# Altium PCB JHZ-E01S-HW-Drive-HI-S0.1-面罩电机驱动器.PcbDoc
Units mil, origin at the board's own origin, x right, y up, seen from the top; angles counter-clockwise.
Board outline 1574.8 x 1968.5 mil, 2 copper layers (Top Layer, Bottom Layer); 85 components, 46 nets, 248 pads, 77 vias.
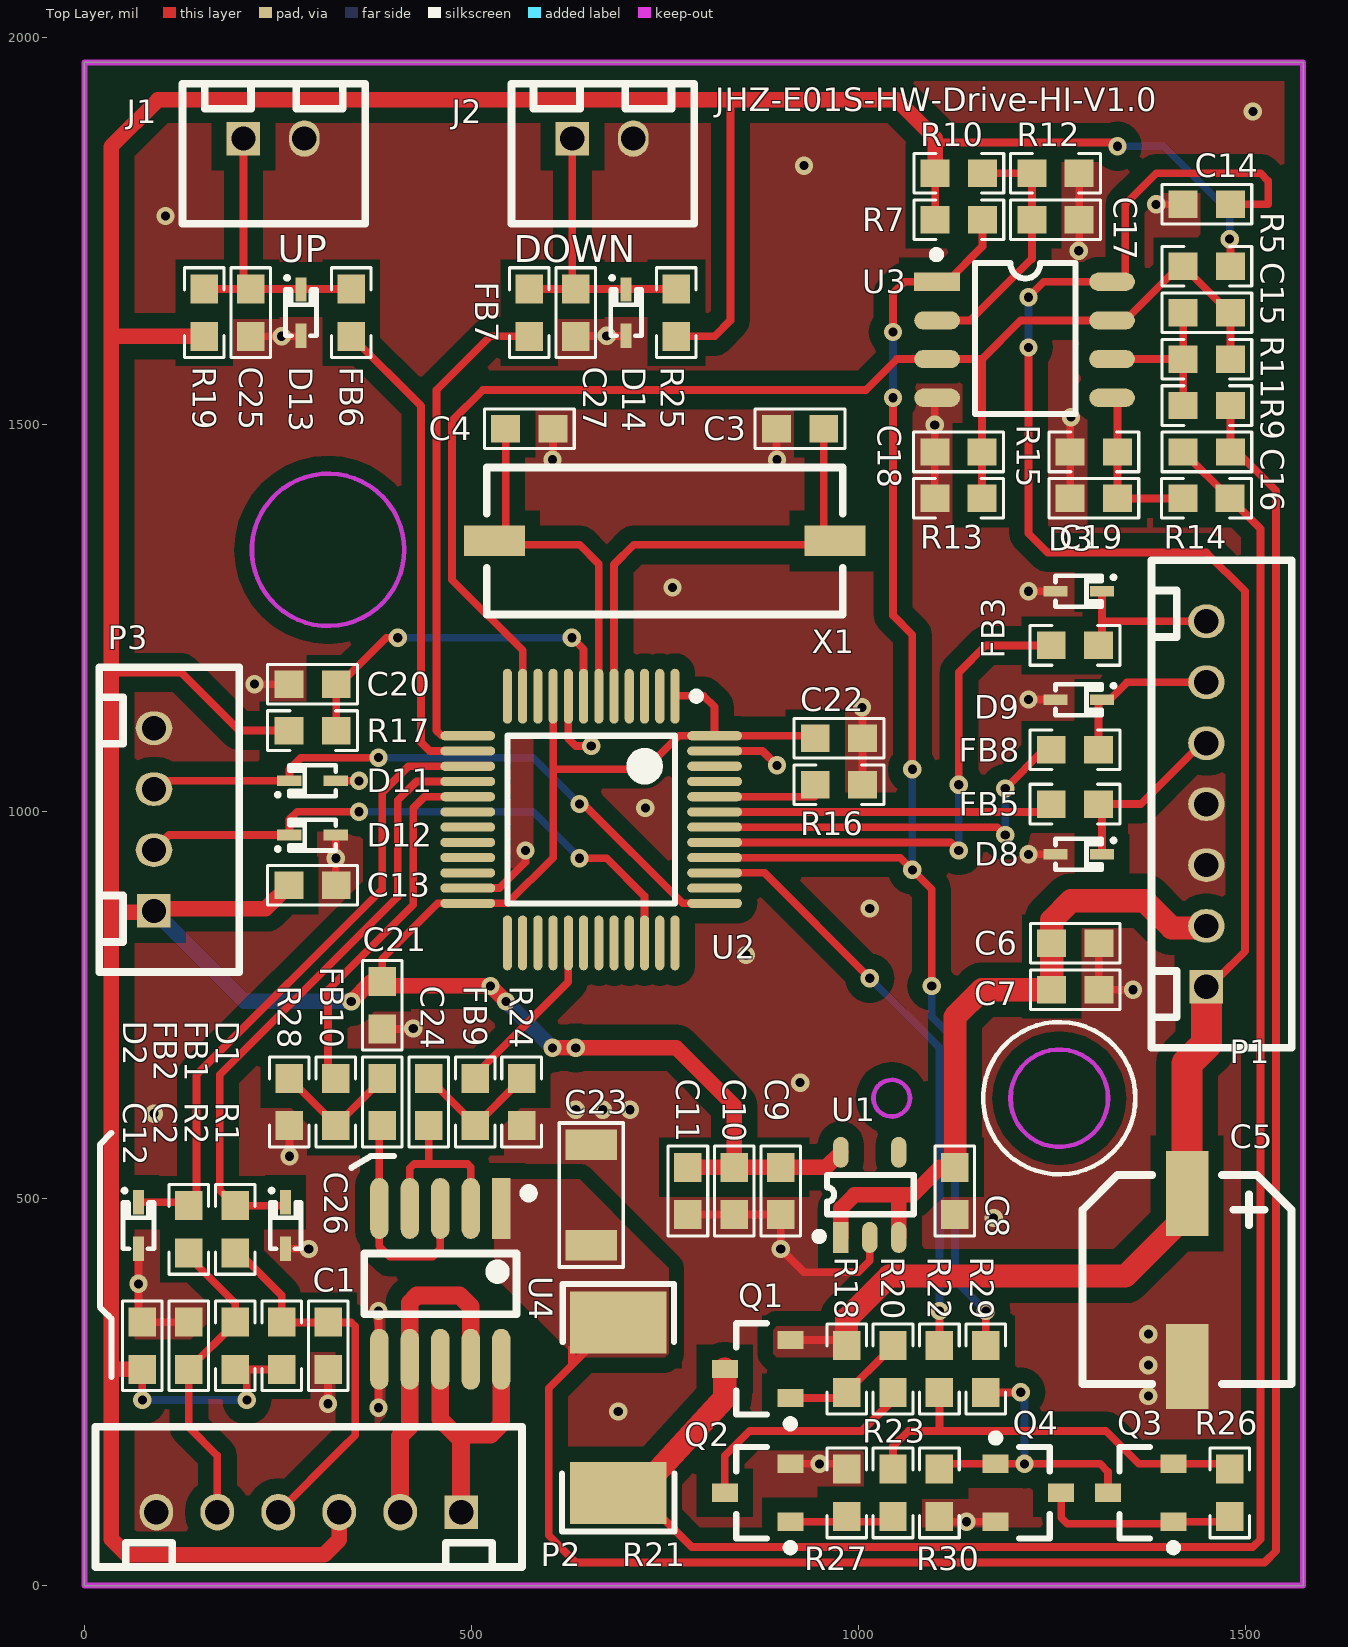
[diagram p0: Top Layer view]
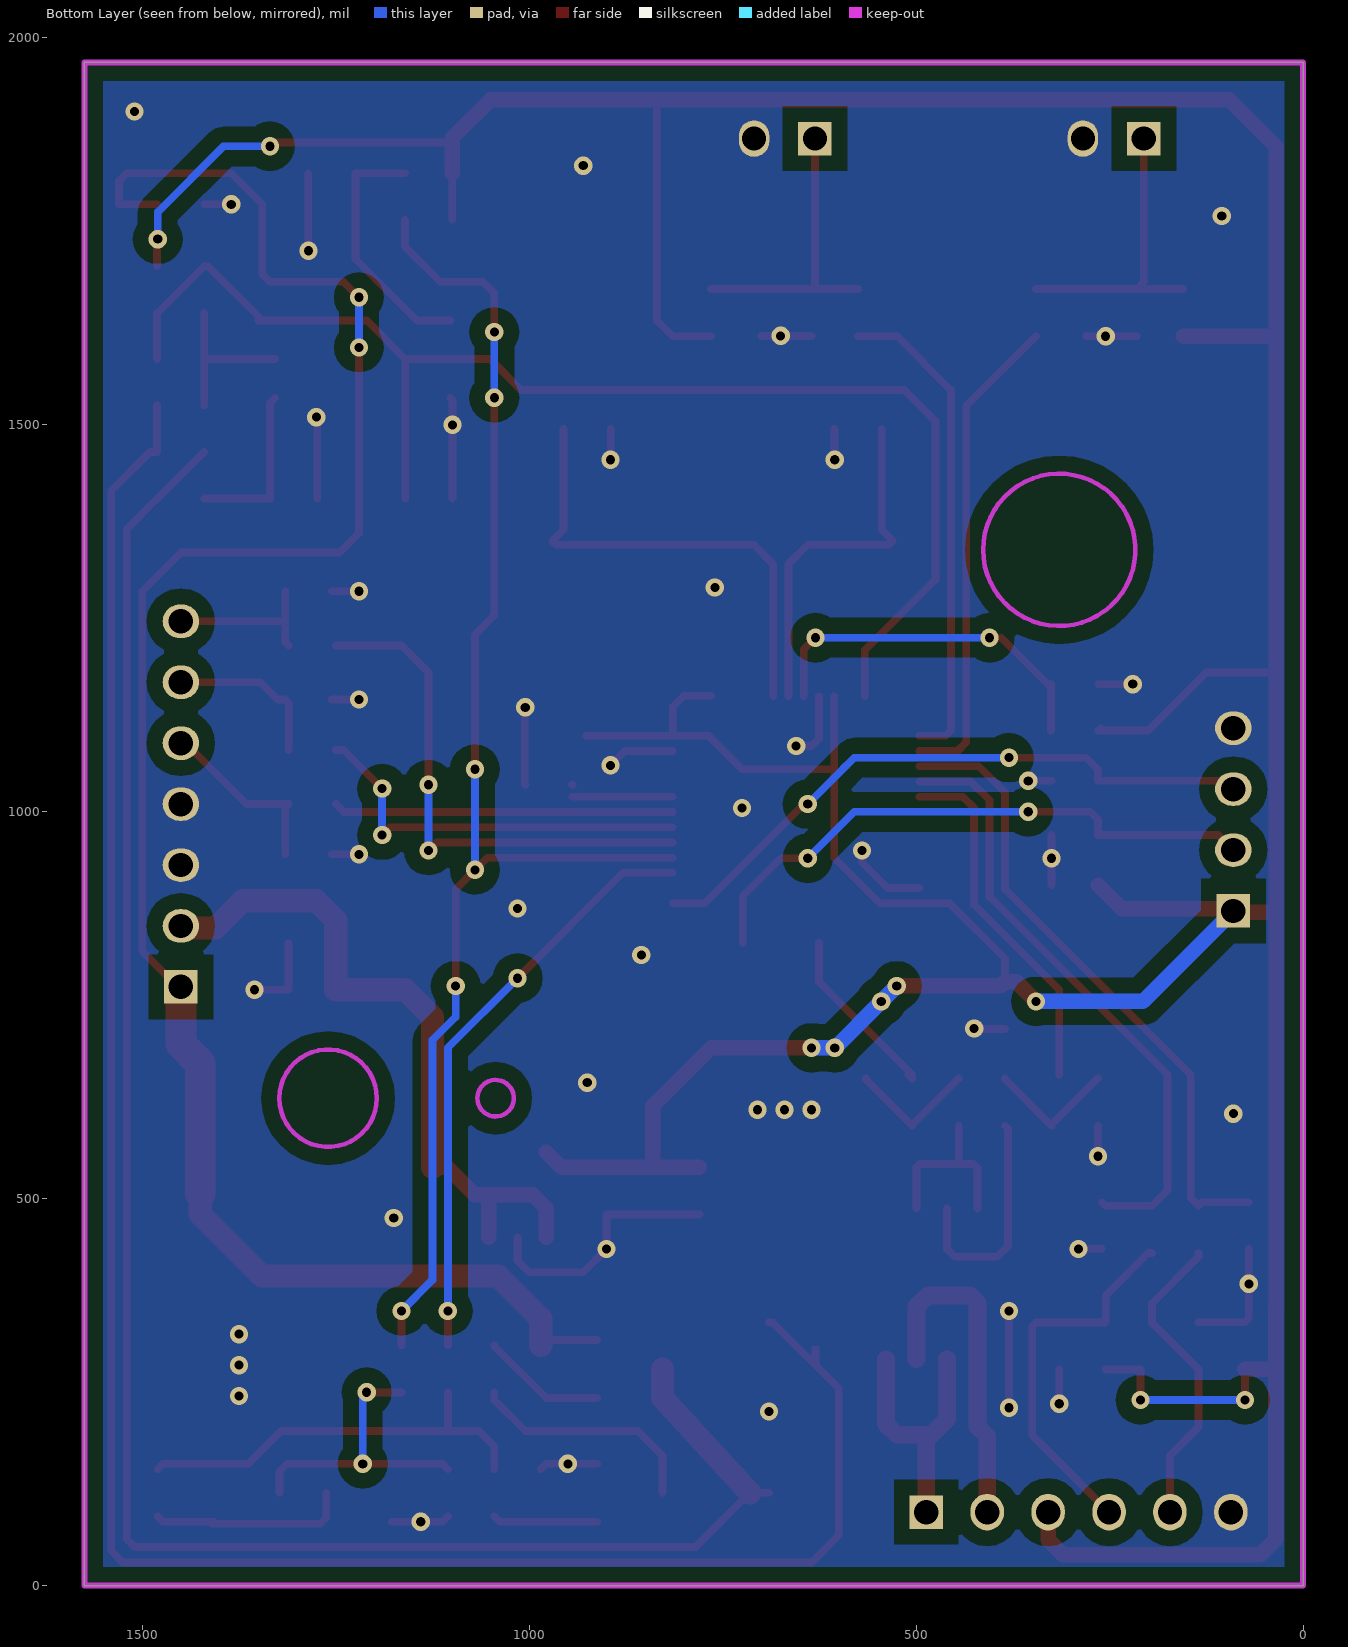
[diagram p1: Bottom Layer view, seen from below]

## Layer stack, top to bottom
Top Layer: signal copper 1.4
Dielectric: dielectric 12.6, FR-4, Dk 4.8
Bottom Layer: signal copper 1.4

## Board outline
0,0 0,1968.5 1574.8,1968.5 1574.8,0

## Design rules (kind name [scope] priority, off if disabled: settings)
Clearance [All] p1: gap=7
ComponentClearance [All] p1: gap=0 collisioncheckmode=3 verticalgap=0 showdistances=FALSE
HoleToHoleClearance [All] p1: gap=0 allowstackedmicrovias=TRUE
MinimumSolderMaskSliver [All] p1: minsoldermaskwidth=0
PlaneConnect [All] p1: planeconnectstyle=Direct reliefexpansion=20 reliefentries=4 reliefconductorwidth=10 reliefairgap=10
PolygonConnect [All] p1: connectstyle=Direct reliefconductorwidth=10 reliefentries=4 polygonreliefangle="90 Angle"
RoutingVias [All] p1: holewidth=11.81 width=23.62 viastyle="Through Hole" minholewidth=11.81 minwidth=23.62 maxholewidth=118.11 maxwidth=236.22
SilkToSilkClearance [All] p1: silktosilkclearance=0
SilkscreenOverComponentPads SilkToSolderMaskClearance [IsPad] p1: minsilkscreentomaskgap=0
SolderMaskExpansion [All] p1: expansion=4
TestPointUsage FabricationTestPointUsage [All] p1: valid=0 allowmultiple=FALSE
Testpoint FabricationTestpoint [All] p1: side=3 testpointundercomponent=TRUE minsize=40 maxsize=100 preferedsize=60 minholesize=0 maxholesize=40 preferedholesize=32 testpointgrid=1 style=297 order=0123456789
Width [All] p1: maxlimit=500 minlimit=7 preferedwidth=10
18 further rules are at their usual default settings.

## Components (designator, comment, footprint, x,y, rotation, side; value= is the part's Value field where it differs from the comment)
C1 "C0603" C0603_M1608 315,310 r270 top
C2 "C0603" C0603_M1608 135,310 r90 top
C3 "C0603" C0603_M1608 925,1495 r0 top
C4 "C0603" C0603_M1608 575,1495 r180 top
C5 "CAP_SMD_6.3*7.7" CAP_SMD_6.3*7.7 1425,395 r0 top
C6 "C0603" C0603_M1608 1280.51,830 r180 top
C7 "C0603" C0603_M1608 1280.51,770 r180 top
C8 "C0603" C0603_M1608 1125,510 r90 top
C9 "C0603" C0603_M1608 900,510 r270 top
C10 "C0603" C0603_M1608 840,510 r270 top
C11 "C0603" C0603_M1608 780,510 r270 top
C12 "C0603" C0603_M1608 75,310 r90 top
C13 "C0603" C0603_M1608 295,905 r0 top
C14 "C0603" C0603_M1608 1450.51,1785 r180 top
C15 "C0603" C0603_M1608 1450.51,1645 r0 top
C16 "C0603" C0603_M1608 1450.51,1465 r0 top
C17 "C0603" C0603_M1608 1255,1765 r180 top
C18 "Cap" C0603_M1608 1129.49,1465 r0 top
C19 "C0603" C0603_M1608 1304.49,1405 r0 top
C20 "C0603" C0603_M1608 295,1165 r0 top
C21 "C0603" C0603_M1608 385,750 r270 top
C22 "C0603" C0603_M1608 975,1095 r0 top
C23 "C1206" C1206_M3216 655,505 r90 top
C24 "C0603" C0603_M1608 445,625 r270 top
C25 "C0603" C0603_M1608 215,1645 r90 top
C26 "C0603" C0603_M1608 385,625 r270 top
C27 "C0603" C0603_M1608 635,1645 r90 top
D1 "SOD-523" SOD-523 260,465.51 r90 top
D2 "SOD-523" SOD-523 70,465.51 r90 top
D3 "SOD-523" SOD-523 1285,1285 r0 top
D8 "SOD-523" SOD-523 1285,945 r0 top
D9 "SOD-523" SOD-523 1285,1145 r0 top
D11 "SOD-523" SOD-523 295,1040 r180 top
D12 "SOD-523" SOD-523 295,970 r180 top
D13 "SOD-523" SOD-523 280,1645 r90 top
D14 "SOD-523" SOD-523 700,1645 r90 top
FB1 "FBM1608-0E0PT" R0603_M1608 195,460.51 r270 top
FB2 "FBM1608-0E0PT" R0603_M1608 135,460.51 r270 top
FB3 "FBM1608-0E0PT" R0603_M1608 1280,1215 r180 top
FB5 "FBM1608-0E0PT" R0603_M1608 1280,1010 r180 top
FB6 "FBM1608-0E0PT" R0603_M1608 345,1645 r90 top
FB7 "FBM1608-0E0PT" R0603_M1608 575,1645 r90 top
FB8 "FBM1608-0E0PT" R0603_M1608 1280,1080 r180 top
FB9 "FBM1608-0E0PT" R0603_M1608 505,625 r90 top
FB10 "FBM1608-0E0PT" R0603_M1608 325,625 r90 top
J1 "PH-A-2P" PH-A-2P 245,1870 r0 top
J2 "PH-A-2P" PH-A-2P 670,1870 r0 top
P1 "PH-A-7P" PH-A-7P 1450,1010 r90 top
P2 "PH-A-6P" PH-A-6P 290,95 r180 top
P3 "PH2.0-4P" PH-A-4P 90,990 r90 top
Q1 "SOT-23-3" SOT-23-3 870,280 r180 top
Q2 "SOT-23" SOT-23_L 870,120 r180 top
Q3 "SOT-23-3" SOT-23-3 1365,120 r180 top
Q4 "SOT-23" SOT-23_L 1220,120 r0 top
R1 "R0603" R0603_M1608 255,310 r270 top
R2 "R0603" R0603_M1608 195,310 r270 top
R5 "R0603" R0603_M1608 1450.51,1705 r180 top
R7 "R0603" R0603_M1608 1130,1765 r180 top
R9 "R0603" R0603_M1608 1450.51,1525 r180 top
R10 "R0603" R0603_M1608 1130,1825 r180 top
R11 "R0603" R0603_M1608 1450.51,1585 r180 top
R12 "R0603" R0603_M1608 1255,1825 r180 top
R13 "R0603" R0603_M1608 1129.49,1405 r0 top
R14 "R0603" R0603_M1608 1450,1405 r180 top
R15 "R0603" R0603_M1608 1304.49,1465 r0 top
R16 "R0603" R0603_M1608 975,1035 r180 top
R17 "R0603" R0603_M1608 295,1105 r180 top
R18 "R0603" R0603_M1608 985,280 r90 top
R19 "R0603" R0603_M1608 155,1645 r270 top
R20 "R0603" R0603_M1608 1045,280 r90 top
R21 "R2512" R2512_M6332 690,230 r90 top
R22 "R0603" R0603_M1608 1105,280 r90 top
R23 "R0603" R0603_M1608 1045,120 r90 top
R24 "R0603" R0603_M1608 565,625 r270 top
R25 "R0603" R0603_M1608 765,1645 r270 top
R26 "R0603" R0603_M1608 1480,120 r90 top
R27 "R0603" R0603_M1608 985,120 r270 top
R28 "R0603" R0603_M1608 265,625 r270 top
R29 "R0603" R0603_M1608 1165,280 r90 top
R30 "R0603" R0603_M1608 1105,120 r90 top
U1 "SOT23-5" SOT-23-5 1015,505 r90 top
U2 "LQFP48_N" LQFP48_N 655,990 r270 top
U3 "SOIC-8" SOIC-8 1215,1610 r0 top
U4 "L-SOIC-10" L-SOIC-10 460,390 r270 top
X1 "8M" HC-49SMD 750,1350 r0 top

## Footprints (in the part's own frame and the unit in brackets; to place one, negate y for a bottom-side part, rotate by r counter-clockwise, add the part's x,y. Pads: shape width x height; smd on the part's side, far side on the other; paste and mask are expansions set on the pad)
C0603_M1608 [mm] "Chip Capacitor, 2-Leads, Body 1.6x0.8mm, IPC Medium Density"
  rect 0.95x0.9 smd: 1(-0.775,0) 2(0.775,0)
  silkscreen extent -1.48,-0.65 1.48,0.65
C1206_M3216 [mm]
  rect 1x1.7 smd: 1(-1.65,0) 2(1.65,0)
  silkscreen extent -2.36,-1.05 2.36,1.05
CAP_SMD_6.3*7.7 [mm]
  rrect0% 1.4x2.8 smd: 1(0,2.838) 2(0,-2.838)
  silkscreen extent -3.43,-3.41 3.43,3.45
HC-49SMD [mm]
  rect 2x1 smd: 1(-5.588,0) 2(5.588,0)
  silkscreen extent -5.84,-2.41 5.84,2.41
L-SOIC-10 [mm]
  rect 2x0.6 smd: 1(-2.475,2)
  oval 2x0.6 smd: 2(-2.475,1) 3(-2.475,0) 4(-2.475,-1) 5(-2.475,-2) 6(2.475,-2) 7(2.475,-1) 8(2.475,0) 9(2.475,1) 10(2.475,2)
  silkscreen extent -3.12,-2.5 1,3.05
LQFP48_N [mm]
  oval 1.8x0.3 smd: 1(-4.05,2.75) 2(-4.05,2.25) 3(-4.05,1.75) 4(-4.05,1.25) 5(-4.05,0.75) 6(-4.05,0.25) 7(-4.05,-0.25) 8(-4.05,-0.75) 9(-4.05,-1.25) 10(-4.05,-1.75) 11(-4.05,-2.25) 12(-4.05,-2.75) 25(4.05,-2.75) 26(4.05,-2.25) 27(4.05,-1.75) 28(4.05,-1.25) 29(4.05,-0.75) 30(4.05,-0.25) 31(4.05,0.25) 32(4.05,0.75) 33(4.05,1.25) 34(4.05,1.75) 35(4.05,2.25) 36(4.05,2.75)
  oval 0.3x1.8 smd: 13(-2.75,-4.05) 14(-2.25,-4.05) 15(-1.75,-4.05) 16(-1.25,-4.05) 17(-0.75,-4.05) 18(-0.25,-4.05) 19(0.25,-4.05) 20(0.75,-4.05) 21(1.25,-4.05) 22(1.75,-4.05) 23(2.25,-4.05) 24(2.75,-4.05) 37(2.75,4.05) 38(2.25,4.05) 39(1.75,4.05) 40(1.25,4.05) 41(0.75,4.05) 42(0.25,4.05) 43(-0.25,4.05) 44(-0.75,4.05) 45(-1.25,4.05) 46(-1.75,4.05) 47(-2.25,4.05) 48(-2.75,4.05)
  silkscreen extent -4.17,-2.75 2.75,3.58
PH-A-2P [mm]
  rect 1.1x1.1 hole 0.8: 1(-1,0)
  oval 1x1.2 hole 0.8: 2(1,0)
  silkscreen extent -3,-2.8 3,1.8
PH-A-4P [mm]
  rect 1.1x1.1 hole 0.8: 1(-3,0)
  oval 1.1x1.2 hole 0.8: 2(-1,0) 3(1,0) 4(3,0)
  silkscreen extent -5,-2.8 5,1.8
PH-A-6P [mm]
  rect 1.1x1.1 hole 0.8: 1(-5,0)
  oval 1.1x1.2 hole 0.8: 2(-3,0) 3(-1,0) 4(1,0) 5(3,0) 6(5,0)
  silkscreen extent -7,-2.8 7,1.8
PH-A-7P [mm]
  rect 1.1x1.1 hole 0.8: 1(-6,0)
  oval 1.1x1.2 hole 0.8: 2(-4,0) 3(-2,0) 4(0,0) 5(2,0) 6(4,0) 7(6,0)
  silkscreen extent -8,-2.8 8,1.8
R0603_M1608 [mm]
  rect 0.95x0.9 smd: 1(-0.775,0) 2(0.775,0)
  silkscreen extent -1.48,-0.65 1.48,0.65
R2512_M6332 [mil]
  rect 80x125 smd: 1(-110,0) 2(110,0)
  silkscreen extent -160,-73 160,73
SOD-523 [mm]
  rect 0.8x0.35 smd: 1(-0.762,0) 2(0.762,0)
  silkscreen extent -0.76,-0.51 1.19,0.51
SOIC-8 [mm]
  rect 1.5x0.6 smd: 1(-2.872,1.905)
  oval 1.5x0.6 smd: 2(-2.872,0.635) 3(-2.872,-0.635) 4(-2.872,-1.905) 5(2.872,-1.905) 6(2.872,-0.635) 7(2.872,0.635) 8(2.872,1.905)
  silkscreen extent -3.02,-2.44 1.68,2.92
SOT-23-3 [mm] "SOT23, 3-Leads, Body 2.9x1.3mm, Pitch 0.95mm, Lead Span 2.5mm, IPC High Density"
  rect 0.85x0.6 smd: 1(-1.075,0.95) 2(-1.075,-0.95) 3(1.075,0)
  silkscreen extent -1.2,-1.5 0.7,1.92, body extent -0.7,-1.5 0.7,1.5, height 1.1
SOT-23-5 [mil] "SOT23, 5-Leads, Body 3.1x3.0mm (max), Pitch 0.95mm, IPC Medium Density"
  rect 40x20 smd: 1(-55,37.4)
  oval 40x20 smd: 2(-55,0) 3(-55,-37.4) 4(55,-37.4) 5(55,37.4)
  silkscreen extent -59,-57 26,70
SOT-23_L [mm] "SOT23, 3-Leads, Body 2.9x1.3mm, Pitch 0.95mm, Lead Span 2.5mm, IPC High Density"
  rect 0.85x0.6 smd: 1(-1.075,0.95) 2(-1.075,-0.95) 3(1.075,0)
  silkscreen extent -1.2,-1.5 0.7,1.92, body extent -0.7,-1.5 0.7,1.5, height 1.1

## Part data
C1 C2 C12 C14 C15 C16 C17 C19: library part MCC0603, "Multilayer Ceramic Capacitor 0603"
C3 C4 C6 C7 C8 C9 C10 C11 C13 C20 C21 C22 C23 C24 C25 C26 C27: library part Cap, "Capacitor"
C5: "SMD Capacitor 6.3*7.7"
C18: "Capacitor"
D1 D2 D3 D8 D9 D11 D12 D13 D14: library part SK2B, "2.0A SURFACE MOUNT SCHOTTKY BARRIER  RECTIFIERS"
FB1 FB2 FB3 FB5 FB6 FB7 FB8 FB9 FB10: "磁珠Ferrite Bead"
J1 J2: "Header, 2.0mm,2-Pin"
P1: "Header, 2.0mm,7-Pin"
P2: "Header, 2.0mm,6-Pin"
P3: library part "Header 4", "Header, 4-Pin"
Q1: library part AO3415, "P-Channel MOSFET"
Q2 Q4: library part NPN, "NPN Bipolar Transistor"
Q3: library part SS8550LT1, "PNP Bipolar Transistor"
R1 R2 R7 R16 R17 R18 R19 R20 R21 R22 R23 R24 R25 R26 R27 R28 R29 R30: library part Res1, "Resistor"
R5 R9 R10 R11 R12 R13 R14 R15: library part R0603_M1608, "Resistor"
U1: library part XC6503D301MR
U2: library part STM32F103C8T6, "STM32 ARM-based 32-bit MCU with 64 Kbytes Flash, 48-pin LQFP, Industrial Temperature"
U3: library part LM358ADR, "Dual Operational Amplifiers"
U4: library part LV8548MC
X1: library part XTAL

## Via types
v1: diameter 23.62, hole 11.81, Top Layer to Bottom Layer, tented both sides, 73 vias
v2: diameter 23.62, hole 11.81, Top Layer to Bottom Layer, 4 vias

## Nets (pads, with @x,y where several pads share a name; then routed paths per layer and width w, separated by ;. In a path a pad name is that pad's centre, name@x,y a point inside that pad or via, vN(x,y) a via of type N, cw(c..) or ccw(c..) an arc to the next point about the centre after c; other vN are vias at no path point)
3V3: C9.1 C10.1 C11.1 C12.1 C13.1 C21.1 C22.1 P2.3 P3.1 R1.2 R2.2 R5.1 R7.2 R10.2 R17.2 R19.2 R25.2 U1.5 U2.1 U2.9 U2.24 U2.48 | length 7314.7
  Top Layer w10: 34.64,1180 125,1180 200,1105 R17.2 R17.2@261.38,1108.11 ; v1(75,240) C12.1 ; v1(210,240) 210,279.49 R1.2 ; C21.1 385,810 456.73,881.73 U2.24 546.73,881.73 605.79,940.79 605.79,1055 ; U2.9 605.79,1055 ; 740,1070 745,1075 ; U2.1@765,1150 800,1150 814.45,1135.55 U2.48 ; R25.2 814.49,1614.49 835,1635 835,1920 ; C10.1@840,539.49 C10.1 ; C22.1@926.22,1098.27 U2.48 ; R7.2 R10.2 ; 1099.49,1870.51 1105,1865 1330,1865 v1(1335,1860) ; R5.1 v1@1481.02,1738.98 ; 605.79,1055 725,1055 745,1075 ; 745,1075 768.27,1098.27 U2.48
  Top Layer w20: C12.1 35,279.49 ; R19.2 34.64,1614.49 ; C13.1 234.49,875 93.11,875 P3.1 88.11,870 34.64,870 ; P2.3 329.37,59.37 310,40 55,40 35,60 35,279.49 ; v1(345,755) 370.51,780.51 C21.1 390.51,775 v1(525,775) v1(545,755) ; v1(605,695) v1(635,695) 765,695 840,620 C10.1 ; C11.1 C10.1 ; U1.5 958.11,540.51 C9.1 C10.1 ; R10.2 1099.49,1870.51 1050,1920 835,1920 95,1920 34.64,1859.64 34.64,1614.49 ; 34.64,870 34.64,360 35,359.64 35,279.49 ; 34.64,870 34.64,1180 34.64,1614.49
  Bottom Layer w10: v1(75,240) v1(210,240) ; v1(1335,1860) 1395,1860 1480,1775 v1(1480,1740)
  Bottom Layer w20: P3.1 206.89,755 v1(345,755) ; v1(525,775) v1(545,755) v1(605,695) v1(635,695)
ADC-I: C15.2 C18.2 R5.2 R11.1 R13.2 U2.11 U3.3 U3.7 | length 1769.1
  Top Layer w10: U2.11 566.42,1208.58 475,1300 475,1505 515,1545 1010,1545 1050,1585 U3.3 1160,1585 ; R13.2 C18.2 1160,1585 ; U3.7@1350,1635 U3.7 ; R11.1 C15.2 1480,1645 R5.2 1415,1705 1345,1635 U3.7 ; 1160,1585 1210,1635 U3.7
ADC-I-M: C16.1 Q1.3 R14.1 R21.1 | length 2533.8
  Top Layer w10: R21.1 715,120 785,50 1510,50 1520,60 1520,620 ; C16.1 1480,1405 R14.1 1520,1365.51 1520,620 ; 1520,640 1520,620
  Top Layer w30: R21.1@715,120 827.68,242.68 Q1.3
ADC-I-M0: C16.2 C23.1 R9.1 R21.2 U4.1 | length 2800.6
  Top Layer w10: R21.2 685,340 600,255 600,65 635,30 1525,30 1540,45 1540,630 ; R9.1 C16.2 1490,1465 1540,1415 1540,630 ; 1540,645 1540,630
EN_PWR: R22.2 U2.39 | length 768.7
  Top Layer w10: U2.39 878.9,921.1 v1(1015,785) ; R22.2 v1(1105,355)
  Bottom Layer w10: v1(1015,785) 1105,695 v1(1105,355)
ENC-A: C1.1 FB1.2 P2.4 R1.1 | length 512.9
  Top Layer w10: FB1.2 200,430 255,375 R1.1 255.51,340 345,340 350,335 350,194.37 332.81,177.18 ; P2.4 332.81,177.18 ; 345,189.37 332.81,177.18
ENC-B: C2.1 FB2.2 P2.5 R2.1 | length 409.5
  Top Layer w10: FB2.2 135,425 195,365 R2.1 ; P2.5 171.89,168.11 135,205 135,225 C2.1 195,339.49 R2.1 ; R2.1@195,350 R2.1
ERR-OI: R7.1 R29.2 U2.40 U3.1 | length 1846.3
  Top Layer w10: U2.40 1054.21,940.79 v1(1070,925) 1095,900 v1(1095,775) ; v1(1045,1535) 1045,1253.8 1070,1228.8 v1(1070,1055) ; v1(1045,1620) 1045,1670 1060,1685 U3.1 1115,1685 1160.51,1730.51 R7.1 ; R29.2 v1(1165,355)
  Bottom Layer w10: v1(1045,1535) v1(1045,1620) ; v1(1070,925) v1(1070,1055) ; v1(1095,775) 1095,735 1125,705 1125,395 v1(1165,355)
GND: C1.2 C2.2 C3.1 C4.1 C5.2 C6.1 C7.1 C8.1 C9.2 C10.2 C11.2 C12.2 C13.2 C14.2 C17.1 C18.1 C19.1 C20.1 C21.2 C22.2 C23.2 C25.1 C27.1 D1.1 D2.1 D3.1 D8.1 D9.1 D11.1 D12.1 D13.1 D14.1 J1.2 J2.2 P1.3 P1.4 P2.6 P3.4 Q2.2 Q4.2 R12.1 R13.1 R15.1 R16.1 R24.2 R27.1 R28.2 R30.1 U1.2 U2.8 U2.23 U2.47 U3.4 U4.6 | length 2227.6
  Top Layer w10: D2.1 70,345.51 C12.2 C2.2 ; C25.1 279.49,1614.49 D13.1 ; v1(220,1165) C20.1 ; D1.1 289.49,435.51 v1(290,435) ; v1(265,555) R28.2 ; v1(315,235) C1.2 ; C13.2@325,905.51 D12.1 ; D11.1 v1(355,1040) ; v1(380,230) v1(380,355) ; C21.2 424.49,719.49 v1(425,720) ; U2.23 536.42,901.42 570,935 v1(570,950) ; v1(605,1455) 605.51,1455.51 C4.1 ; U2.8 625.47,1094.53 635,1085 v1(655,1085) ; C27.1 635.51,1615 D14.1 ; C11.2 C10.2 C9.2 v1(900,435) 930,405 1000,405 1015,420 U1.2 ; U2.47 876.42,1078.58 v1(895,1060) ; C3.1 894.49,1455.51 v1(895,1455) ; Q2.2 978.11,157.4 R27.1 ; R16.1@1004.49,1035 R16.1 C22.2 1005.51,1134.49 v1(1005,1135) ; R13.1 C18.1 1098.98,1532.03 U3.4 ; R30.1 1111.89,82.6 Q4.2 ; v1(1220,945) D8.1 ; v1(1220,1145) D9.1 ; v1(1220,1285) D3.1 ; C19.1 R15.1 1273.98,1508.98 v1(1275,1510) ; v1(1285,1725) 1285.51,1725.51 C17.1 R12.1 ; C6.1 C7.1 v1(1355,770) ; v1(1385,1785) C14.2
  other v1: 1140,82.6 950,157.4 690,225 1375,245 1375,285 1375,325 70,390 1175,475 90,610 635,615 670,615 705,615 925,650 855,815 1015,875 325,940 725,1005 760,1290 1098.98,1500 255,1614.49 675,1615 105,1770 930,1835 1510,1905
GPIO-MASK: FB3.2 U2.41 | length 683.9
  Top Layer w10: U2.41 1119.53,960.47 v2(1130,950) ; v2(1130,1035) 1130,1180 1165,1215 FB3.2
  Bottom Layer w10: v2(1130,950) v2(1130,1035)
GPIO-MASK-INT: D3.2 FB3.1 P1.7 | length 207.4
  Top Layer w10: FB3.1 1315,1219.49 1315,1245 ; D3.2 1315,1245 ; P1.7 1316.22,1246.22 1315,1245
IIC_SCL0: FB8.2 U2.42 | length 520
  Top Layer w10: U2.42 1179.84,980.16 v2(1190,970) ; v2(1190,1030) 1240,1080 FB8.2
  Bottom Layer w10: v2(1190,970) v2(1190,1030)
IIC_SCL-J: D9.2 FB8.1 P1.6 | length 211.2
  Top Layer w10: FB8.1 1310.51,1100 1310.51,1140.51 D9.2 1325,1145 1347.48,1167.48 P1.6
IIC_SDA0: FB5.2 U2.43 | length 439.2
  Top Layer w10: U2.43 1239.33,999.84 FB5.2
IIC_SDA-J: D8.2 FB5.1 P1.5 | length 268.5
  Top Layer w10: D8.2 1315,1005.51 FB5.1 ; 1340,1010 FB5.1 ; P1.5 1443.74,1088.74 1365,1010 FB5.1
IO-ENC-A: D1.2 FB1.1 U2.16 | length 809.1
  Top Layer w10: FB1.1@185,501.02 FB1.1 ; D1.2 255.51,491.02 FB1.1 ; U2.16 429.21,1039.21 405,1015 405,890 175,660 175,511.02 FB1.1
IO-ENC-B: D2.2 FB2.1 U2.15 | length 832.6
  Top Layer w10: D2.2 FB2.1@130.51,495.51 ; FB2.1 145,501.02 145,660 385,900 385,990 ; 385,980 385,990 ; U2.15 418.9,1058.9 385,1025 385,990
IO_KEY1: FB6.1 U2.14 | length 652
  Top Layer w10: FB6.1 435,1524.49 435,1275 ; 435,1250 435,1275 ; U2.14 446.42,1078.58 435,1090 435,1275
IO_KEY1-J: C25.2 D13.2 FB6.2 J1.1 R19.1 | length 388.4
  Top Layer w10: R19.1 C25.2 ; J1.1 205.63,1684.88 C25.2 ; FB6.2 C25.2
IO_KEY2: FB7.1 U2.13 | length 657.1
  Top Layer w10: 455,1255 455,1280 ; U2.13 461.73,1098.27 455,1105 455,1280 ; FB7.1 524.49,1614.49 455,1545 455,1280
IO_KEY2-J: C27.2 D14.2 FB7.2 J2.1 R25.1 | length 386.3
  Top Layer w10: FB7.2 C27.2 ; J2.1 630.63,1679.88 C27.2 ; R25.1 C27.2
MOTOR+: P2.1 U4.8 U4.10 | length 356.9
  Top Layer w23: U4.8 460,215 480,195 ; P2.1 486.85,188.15 480,195 ; U4.10 538.74,208.74 525,195 480,195
MOTOR-: P2.2 U4.7 U4.9 | length 432.5
  Top Layer w23: P2.2 408.11,193.11 420.63,205.63 U4.7 420.63,365.63 430,375 485,375 499.37,360.63 U4.9
NetC3_2: C3.2 U2.5 X1.2 | length 629.2
  Top Layer w10: U2.5 684.53,1319.53 710,1345 750,1345 ; 740,1345 965,1345 X1.2 955.51,1364.49 C3.2
NetC4_2: C4.2 U2.6 X1.1 | length 468.9
  Top Layer w10: C4.2 544.49,1364.49 X1.1 535,1345 640,1345 664.84,1320.16 U2.6
NetC15_1: C15.1 R9.2 R11.2 U3.6 | length 211.9
  Top Layer w10: U3.6 R11.2 ; R9.2 R11.2 ; C15.1 R11.2
NetC19_2: C19.2 R14.2 R15.2 U3.5 | length 217.4
  Top Layer w10: U3.5 1335,1528.06 C19.2 R14.2
NetC20_2: C20.2 R17.1 U2.7 | length 471.2
  Top Layer w10: R17.1 C20.2 330,1165 390,1225 v1(405,1225) ; v1(630,1225) 645.16,1209.84 U2.7
  Bottom Layer w10: v1(405,1225) v1(630,1225)
NetC24_2: C24.2 U4.2 U4.4 | length 237.5
  Top Layer w10: U4.4 420.63,539.37 426.26,545 445,545 ; C24.2 445,545 ; U4.2 499.37,540.63 495,545 445,545
NetC26_2: C26.2 U4.3 U4.5 | length 298.3
  Top Layer w10: C26.2 381.26,590.75 U4.5 381.26,438.74 395,425 450,425 460,435 U4.3
NetQ1_1: Q1.1 R18.1 R20.2 | length 161.4
  Top Layer w10: Q1.1 978.11,242.6 1045,309.49 R20.2
NetQ2_1: Q2.1 R23.1 R27.2 | length 135.5
  Top Layer w10: Q2.1 1038.11,82.6 R23.1
NetQ2_3: Q2.3 R20.1 | length 304.4
  Top Layer w10: Q2.3 827.68,167.68 860,200 1005,200 1045,240 R20.1
NetQ3_1: Q3.1 Q4.3 R26.1 | length 262.1
  Top Layer w10: Q4.3 1262.32,87.68 1270,80 Q3.1@1409.72,80 ; Q3.1@1404.72,80 Q3.1 1473.11,82.6 R26.1
NetQ3_2: Q3.2 R22.1 R23.2 R26.2 | length 552.4
  Top Layer w10: R23.2 1045,180 1065.14,200.14 1065.29,200 1105,200 ; R22.1@1105,240 R22.1 1105,200 ; R26.2 1473.11,157.4 Q3.2 1362.6,157.4 1320,200 1105,200
NetQ3_3: Q3.3 Q4.1 R29.1 R30.2 | length 391.9
  Top Layer w10: R30.2 1111.89,157.4 Q4.1 v1(1215,157.4) 1312.6,157.4 1322.68,147.32 Q3.3 ; R29.1 1209.49,249.49 v1(1210,250)
  Bottom Layer w10: v1(1210,250) 1215,245 v1(1215,157.4)
NetR16_2: R16.2 U2.44 | length 130.2
  Top Layer w10: U2.44 R16.2@944.02,1019.53 ; R16.2@944.02,1034.53 R16.2
OI-REF: C17.2 R10.1 R12.2 U3.2 | length 330
  Top Layer w10: U3.2 1145,1635 1224.49,1714.49 C17.2 R12.2 R10.1
PWM1: C24.1 FB9.1 R24.1 | length 171.8
  Top Layer w10: C24.1 505,595.51 FB9.1 565,654.49 R24.1
PWM2: C26.1 FB10.1 R28.1 | length 171.8
  Top Layer w10: R28.1 325,595.51 FB10.1 385,654.49 C26.1
PWR-12V: C5.1 C14.1 P1.1 Q1.2 R18.2 U3.8 | length 2552.7
  Top Layer w10: Q1.2 978.11,317.4 R18.2 ; v1(1220,1600) 1220,1360 1245,1335 1450,1335 1500,1285 1500,820 P1.1@1465,785 ; v1(1220,1665) 1240,1685 U3.8 1335,1685 1345,1695 1345,1785 1385,1825 1520,1825 1530,1815 1530,1785 C14.1
  Top Layer w30: R18.2 985,345 1040,400 1345,400 1425,480 C5.1
  Top Layer w40: C5.1 1425,675 1450,700 P1.1
  Bottom Layer w10: v1(1220,1600) v1(1220,1665)
SWCLK: D11.2 P3.3 U2.37 | length 848.4
  Top Layer w10: P3.3@94.37,1025 P3.3 100.63,1040 D11.2 265,1055 280,1070 v1(380,1070) ; v1(640,1010) 645,1010 773.27,881.73 U2.37
  Bottom Layer w10: v1(380,1070) 580,1070 600,1050 ; 590,1060 600,1050 ; v1(640,1010) 600,1050
SWDIO: D12.2 P3.2 U2.34 | length 786.8
  Top Layer w10: P3.2@100.63,940 P3.2 109.37,970 D12.2 265,990 275,1000 v1(355,1000) ; v1(640,940) 675,940 723.9,891.1 U2.34
  Bottom Layer w10: v1(355,1000) 580,1000 v1(640,940)
TIM1_CH1: FB9.2 U2.29 | length 245.4
  Top Layer w10: FB9.2@510,660.51 FB9.2 505,660 625,780 ; 615.52,770.52 625.47,780.47 U2.29
TIM1_CH1N: FB10.2 U2.17 | length 467.1
  Top Layer w10: FB10.2@315,660 315,770 425,880 425,1005 439.53,1019.53 U2.17
VDD5V: C6.2 C7.2 C8.2 P1.2 U1.1 U1.3 | length 922.8
  Top Layer w20: U1.1 977.6,487.6 995,505 1050,505 ; U1.3 1052.4,502.6 1050,505 ; C8.2 1105.51,540.51 1070,505 1050,505
  Top Layer w30: C8.2 1125,735 1160,770 1190,770 ; 1180,770 C7.2 C6.2 1250,860 1275,885 1370,885 1405,850 1447.48,850 P1.2
pads on no net: U1.4 U2.2 U2.3 U2.4 U2.10 U2.12 U2.18 U2.19 U2.20 U2.21 U2.22 U2.25 U2.26 U2.27 U2.28 U2.30 U2.31 U2.32 U2.33 U2.35 U2.36 U2.38 U2.45 U2.46

## Polygon pours and split planes (outlines as drawn)
GND on Top Layer "Top Layer-No Net" (solid, remove dead copper, pour order 1002): -170,2100 -170,5 0,-165 1590,-165 1830,75 1830,1820 1595,2055
ADC-I-M0 on Top Layer "Top Layer-No Net" (solid, remove dead copper, pour order 1001): 635,295 530,400 530,455 530,525 640,525 725,440 755,410 755,325 755,300 750,295
PWR-12V on Top Layer "Top Layer-No Net" (solid, remove dead copper, pour order 1000): 890,320 890,330 895,335 920,335 985,335 985,295 925,295 900,295 895,295 890,300
GND on Bottom Layer "Top Layer-No Net" (solid, remove dead copper, pour order 1003): -225,2100 -225,65 70,-230 1585,-230 1790,-25 1790,1875 1505,2160

## Keep-outs
Keep-Out Layer:
  circle w5.91: c1043.31,629.92 r23.62
  circle w5.91: c314.96,1338.58 r98.43
  circle w5.91: c1259.84,629.92 r62.99
  lines w7.87: 0,0 1574.8,0 1574.8,1968.5 0,1968.5 0,0

## Other copper
Top Layer:
  rectangle net ADC-I-M0: 625,286.24 635,310

## Silkscreen, mask and mechanical layers (free items; w line width, h text height)
Top Overlay:
  circle w5.91: c1259.84,629.92 r98.43
  lines w7.87: 30,350 35,345 ; 35,270 35,345 ; 35,585 20,570 20,360 35,345 ; 344.99,540 370,555 400,555
  text "JHZ-E01S-HW-Drive-HI-V1.0" at 815,1905 h30
  text "UP" at 250,1710 h35
  text "DOWN" at 555,1710 h35